# EAGLE board atmega32u4-board (EAGLE 6.4)
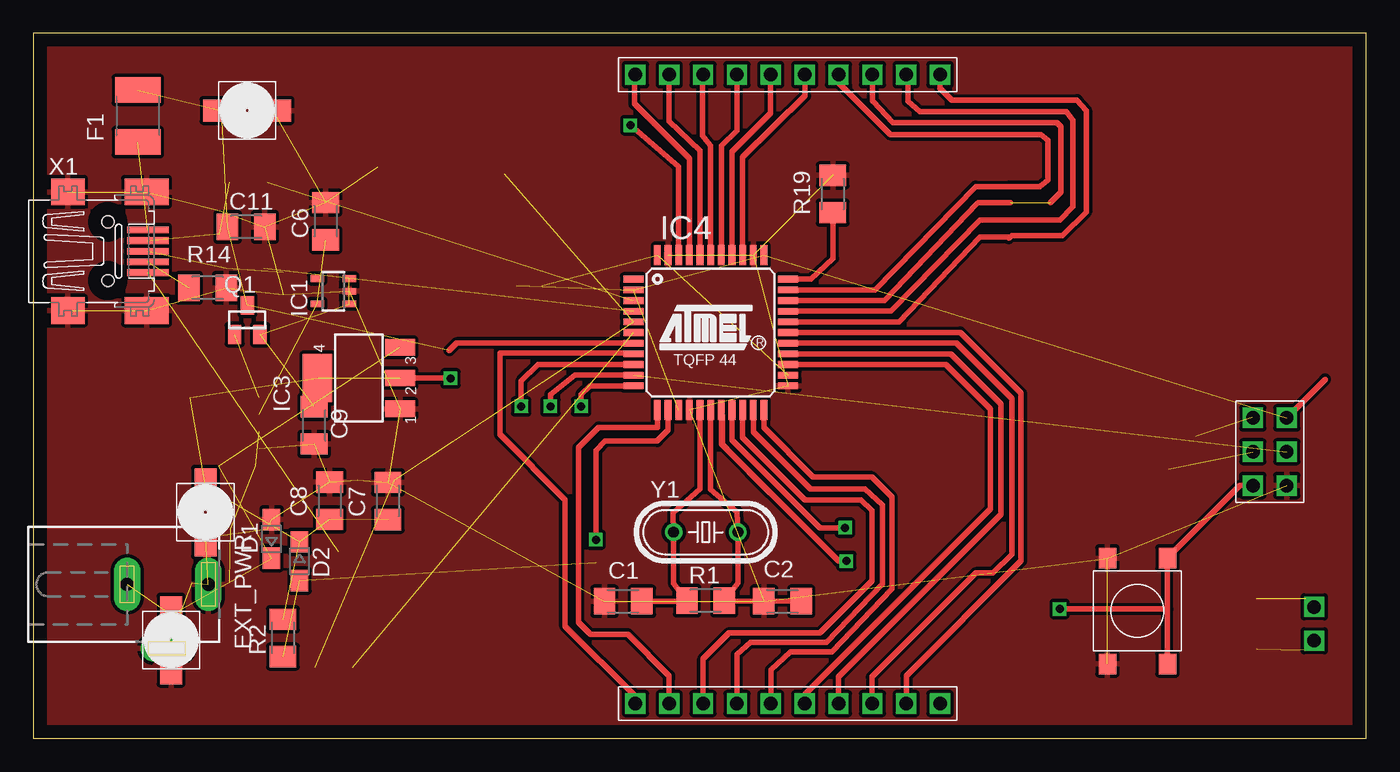
[diagram p0: board, top side]
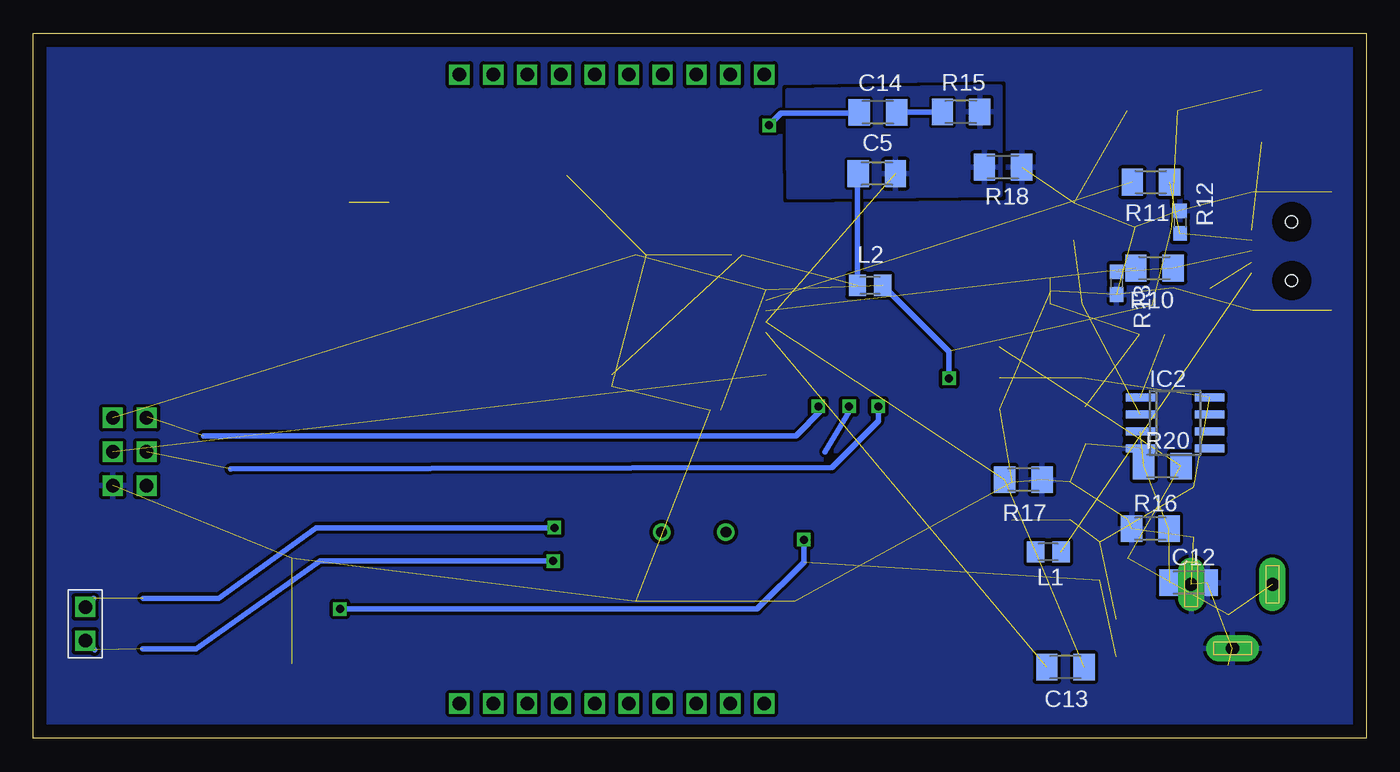
[diagram p1: board, bottom side, seen from below]

Size 100 x 52.9 mm. Coordinates in mm from the lower left corner, seen from the top.
Outline: 0,0 100,0 100,52.9 0,52.9 0,0
Copper layers (1*16): Top 0.035mm / dielectric 1.5mm / Bottom 0.035mm
Design rules "default": minimum track width 10mil, minimum drill 0.6mm, track to track 8mil, track to pad 8mil, pad to pad 8mil, via to via 8mil, smd to smd 8mil, copper to edge 40mil, drill to drill 8mil, minimum pad ring 10mil, minimum via ring 8mil, stop-mask expansion 4mil, vias tented up to drill 0mil, thermal gap 10mil

## Footprints (pad centres in the part's own frame; a part is rotated, then mirrored left to right if it is on the bottom)
SMD_1206_3216M = smd 1.6 x 2: 1 -1.4,0; 2 1.4,0
PANASONIC_SMD_CAP_B = smd 1.65 x 2.8: P$1 0,1.9; P$2 0,-1.9
SOD323 = smd 1.6 x 1.3: A 1.45,0; C -1.45,0
DCJ0202 = drill 1 pad 2 long: 1 0,3.1; 2 4.8,0; 3 0,-3
SMD_1812_4532M = smd 1.9 x 3.4: 1 -1.95,0; 2 1.95,0
HEADER_1_2 = drill 1.016 square: 1 -1.27,0; 2 1.27,0
HEADER_1_10 = drill 1.016 square: 1 -11.43,0; 2 -8.89,0; 3 -6.35,0; 4 -3.81,0; 5 -1.27,0; 6 1.27,0; 7 3.81,0; 8 6.35,0; 9 8.89,0; 10 11.43,0
SOT23-5 = smd 0.5 x 1: 1 -0.95,-1.2; 2 0,-1.2; 3 0.95,-1.2; 4 0.95,1.2; 5 -0.95,1.2
SO08 = smd 0.6 x 2.2: 1 -1.905,-2.6; 2 -0.635,-2.6; 3 0.635,-2.6; 4 1.905,-2.6; 5 1.905,2.6; 6 0.635,2.6; 7 -0.635,2.6; 8 -1.905,2.6
SOT223 = smd 1.219 x 2.235: 1 -2.311,-3.099; 2 0,-3.099; 3 2.311,-3.099 | smd 3.6 x 2.2: 4 0,3.099
TQFP44 = smd 1.5 x 0.5: 1 -5.8,4; 2 -5.8,3.2; 3 -5.8,2.4; 4 -5.8,1.6; 5 -5.8,0.8; 6 -5.8,0; 7 -5.8,-0.8; 8 -5.8,-1.6; 9 -5.8,-2.4; 10 -5.8,-3.2; 11 -5.8,-4; 23 5.8,-4; 24 5.8,-3.2; 25 5.8,-2.4; 26 5.8,-1.6; 27 5.8,-0.8; 28 5.8,0; 29 5.8,0.8; 30 5.8,1.6; 31 5.8,2.4; 32 5.8,3.2; 33 5.8,4 | smd 0.5 x 1.5: 12 -4,-5.8; 13 -3.2,-5.8; 14 -2.4,-5.8; 15 -1.6,-5.8; 16 -0.8,-5.8; 17 0,-5.8; 18 0.8,-5.8; 19 1.6,-5.8; 20 2.4,-5.8; 21 3.2,-5.8; 22 4,-5.8; 34 4,5.8; 35 3.2,5.8; 36 2.4,5.8; 37 1.6,5.8; 38 0.8,5.8; 39 0,5.8; 40 -0.8,5.8; 41 -1.6,5.8; 42 -2.4,5.8; 43 -3.2,5.8; 44 -4,5.8
HEADER_2_3 = drill 1.016 square: 1 -2.54,-1.27; 2 -2.54,1.27; 3 0,-1.27; 4 0,1.27; 5 2.54,-1.27; 6 2.54,1.27
SMD_0805_2012M = smd 1.3 x 1.6: 1 -0.95,0; 2 0.95,0
SUPER-SOT3 = smd 1 x 1.4: 1 -0.95,-1.1; 2 0.95,-1.1; 3 0,1.1
SMD_0603_1608M = smd 1.1 x 1: 1 -0.85,0; 2 0.85,0
OMRON_BS3_TAC_SWITCH = smd 1.55 x 1.3: P$1 3.975,-2.25; P$2 -3.97,-2.25; P$3 3.97,2.25; P$4 -3.97,2.25
32005-201 = smd 3.1 x 0.5: 1 3,1.6; 2 3,0.8; 3 3,0; 4 3,-0.8; 5 3,-1.6 | smd 2.5 x 2: M1 -3,-4.45; M2 -3,4.45 | smd 3.3 x 2: M3 2.9,4.45; M4 2.9,-4.45 | hole 0.9: 0,2.2; 0,-2.2
HC49/S = drill 0.813: 1 -2.413,0; 2 2.413,0

## Placement (x,y rotation side)
C1  22pF  [SMD_1206_3216M]  44.26,10.28 180 top
C2  22pF  [SMD_1206_3216M]  56.21,10.28 180 top
C3  10uF  [PANASONIC_SMD_CAP_B]  10.34,7.36 0 top
C4  10uF  [PANASONIC_SMD_CAP_B]  12.92,16.96 0 top
C5  1uF  [SMD_1206_3216M]  36.72,42.37 0 bottom
C6  1uF  [SMD_1206_3216M]  21.93,38.8 90 top
C7  0.1uF  [SMD_1206_3216M]  26.6,17.8 90 top
C8  0.1uF  [SMD_1206_3216M]  22.23,17.82 90 top
C9  1uF  [SMD_1206_3216M]  21.07,23.48 270 top
C10  10uF  [PANASONIC_SMD_CAP_B]  16.04,47.1 90 top
C11  0.1uF  [SMD_1206_3216M]  15.97,38.37 0 top
C12  0.1uF  [SMD_1206_3216M]  13.32,11.67 0 bottom
C13  1uF  [SMD_1206_3216M]  22.56,5.33 0 bottom
C14  0.1uF  [SMD_1206_3216M]  36.63,46.97 0 bottom
D1  [SOD323]  17.87,14.96 90 top
D2  [SOD323]  19.97,13.28 270 top
EXT_PWR  [DCJ0202]  10.03,11.55 270 top
F1  500mA  [SMD_1812_4532M]  7.84,46.69 90 top
HDR3  [HEADER_1_2]  96.1,8.58 90 bottom
HDR_LWR  [HEADER_1_10]  56.6,2.6 0 top
HDR_UPR  [HEADER_1_10]  56.6,49.8 0 top
IC1  [SOT23-5]  22.5,33.55 90 top
IC2  [SO08]  14.35,23.66 270 bottom
IC3  [SOT223]  24.42,27.03 90 top
IC4  [TQFP44]  50.82,30.45 0 top
ICSP  [HEADER_2_3]  92.77,21.5 270 top
L1  30Ω @ 100Mhz  [SMD_0805_2012M]  23.85,13.98 0 bottom
L2  30Ω @ 100Mhz  [SMD_0805_2012M]  37.22,33.98 0 bottom
Q1  [SUPER-SOT3]  16.06,31.4 0 top
R1  1MΩ  [SMD_1206_3216M]  50.44,10.32 0 top
R2  10kΩ  [SMD_1206_3216M]  18.73,7.52 90 top
R10  22Ω  [SMD_1206_3216M]  15.88,35.28 180 bottom
R11  22Ω  [SMD_1206_3216M]  16.14,41.73 180 bottom
R12  [SMD_0603_1608M]  13.97,38.73 270 bottom
R13  [SMD_0603_1608M]  18.73,34.15 90 bottom
R14  [SMD_1206_3216M]  13.08,33.8 0 top
R15  [SMD_1206_3216M]  30.4,47 0 bottom
R16  10kΩ  [SMD_1206_3216M]  16.19,15.72 0 bottom
R17  [SMD_1206_3216M]  25.72,19.4 0 bottom
R18  [SMD_1206_3216M]  27.24,42.85 0 bottom
R19  10kΩ  [SMD_1206_3216M]  59.98,40.84 90 top
R20  10kΩ  [SMD_1206_3216M]  15.29,20.42 0 bottom
SW2  [OMRON_BS3_TAC_SWITCH]  82.84,9.54 90 top
X1  [32005-201]  5.59,36.55 0 top
Y1  16Mhz  [HC49/S]  50.45,15.46 0 top

## Library data of the parts
C1-C14 D1 D2 F1 HDR3 HDR_LWR HDR_UPR IC1-IC4 ICSP L1 L2 Q1 R1 R2 R10-R20 SW2 Y1 = kris-verified
EXT_PWR = kris-verified; OC_FARNELL: unknown; OC_NEWARK: unknown
X1 = con-cypressindustries; OC_FARNELL: unknown; OC_NEWARK: unknown

## Nets
+3V3: C6.1 IC1.5 IC2.2
+5V: C4.P$1 C7.1 C8.1 D2.C IC2.8 IC3.2 IC3.4 IC4.2 IC4.14 IC4.34 ICSP.2 L2.2 R2.2
AGND: C5.2 C13.2 IC4.5 L1.1 R15.2 R17.1 R18.1
GND: C1.2 C2.2 C3.P$2 C4.P$2 C6.2 C7.2 C8.2 C9.2 C10.P$2 C11.2 C12.2 D1.A EXT_PWR.1 EXT_PWR.2 IC1.2 IC2.4 IC3.1 IC4.15 IC4.23 IC4.35 IC4.43 ICSP.6 R12.1 R13.1 R14.2 R16.1 R17.2 R18.2 R19.2 SW2.P$3 SW2.P$4 X1.M1 X1.M2 X1.M3 X1.M4
HDR_B0: HDR_LWR.1 IC4.8
HDR_B4: HDR_LWR.9 IC4.28
HDR_B5: HDR_UPR.10 IC4.29
HDR_B6: HDR_UPR.9 IC4.30
HDR_B7: HDR_LWR.2 IC4.12
HDR_C6: HDR_UPR.8 IC4.31
HDR_C7: HDR_UPR.7 IC4.32
HDR_D2: HDR_LWR.3 IC4.20
HDR_D3: HDR_LWR.4 IC4.21
HDR_D4: HDR_LWR.6 IC4.25
HDR_D5: HDR_LWR.5 IC4.22
HDR_D6: HDR_LWR.7 IC4.26
HDR_D7: HDR_LWR.8 IC4.27
HDR_E6: IC4.1
HDR_F0: HDR_UPR.1 IC4.41
HDR_F1: HDR_UPR.2 IC4.40
HDR_F4: HDR_UPR.3 IC4.39
HDR_F5: HDR_UPR.4 IC4.38
HDR_F6: HDR_UPR.5 IC4.37
HDR_F7: HDR_UPR.6 IC4.36
MISO: IC4.11 ICSP.1
MOSI: IC4.10 ICSP.4
N$1: C1.1 IC4.16 R1.1 Y1.1
N$3: IC4.33 R19.1
N$4: R10.1 R13.2 X1.3
N$5: C14.1 IC4.42
N$6: C5.1 IC4.24 IC4.44 L2.1
N$8: C9.1 IC1.1 IC1.3 Q1.2
N$14: C14.2 R15.1
N$22: R11.1 R12.2 X1.2
N$23: F1.1 X1.1
N$24: R14.1 X1.4
N$25: C12.1 IC2.3 R16.2 R20.1
N$26: IC2.1 Q1.1
N$34: HDR_LWR.10
Q1: C2.1 IC4.17 R1.2 Y1.2
RD+: IC4.4 R10.2
RD-: IC4.3 R11.2
RESET: D2.A IC4.13 ICSP.5 R2.1 SW2.P$1 SW2.P$2
SCK: IC4.9 ICSP.3
SCL: HDR3.1 IC4.18
SDA: HDR3.2 IC4.19
UCAP: C13.1 IC4.6
UGND: L1.2 X1.5
VIN: C3.P$1 D1.C EXT_PWR.3 IC3.3 R20.2
VUSB: C10.P$1 C11.1 F1.2 IC4.7 Q1.3

## Tracks (layer width: path | path; a pad name or v marks a point on that pad's centre or on a via)
+3V3  (2 unrouted)
+5V  (via drill 0.6)  (11 unrouted)
  Top 0.406: 54.8,36.27 IC4.34 | IC3.2 31.3,27.03 v31.3,27 | 96.92,26.92 ICSP.2
  Bottom 0.406: v31.3,27 31.3,29.01 L2.2
AGND  (4 unrouted)
  pour Bottom: 43.4,48.6 43.3,40.6 27.5,40.8 27.5,48.9
GND  (34 unrouted)
  pour Top (isolate 0.254): -0.3,41 -0.3,-0.6 100.4,-0.6 100.5,-0.5 100.3,53.3 0.7,53.3
  pour Bottom (isolate 0.254, rank 2): 0,53.5 100.5,53.5 100.4,40.3 100.4,-0.3 43.5,-0.3 41.9,-0.2 42,-0.5 29.6,-0.4 -0.3,-0.4 -0.3,40.8
HDR_B0
  Top 0.406: HDR_LWR.1 45.17,3.13 39.9,8.4 39.9,17.9 35,22.8 35,28.9 44.97,28.9 IC4.8
HDR_B4
  Top 0.406: IC4.28 69.55,30.45 74.1,25.9 74.1,13.3 65.5,4.7 HDR_LWR.9
HDR_B5
  Top 0.406: HDR_UPR.10 68.03,48.77 68.9,47.9 78.3,47.9 79,47.1 79,39.5 77.2,37.7 73.4,37.7 73.17,37.52 73.25,37.6 71,37.6 64.95,31.25 IC4.29
HDR_B6
  Top 0.406: IC4.30 64.35,32.05 71,38.9 77,38.9 78,39.9 78,46.4 77.5,47 66.5,47 65.6,47.8 65.6,49.69 HDR_UPR.9
HDR_B7
  Top 0.406: HDR_LWR.2 47.71,4.49 47.7,4.5 47.7,4.7 44.6,7.8 41.8,7.8 40.9,8.7 40.9,21.8 42.42,23.32 46.82,23.32 IC4.12
HDR_C6  (1 unrouted)
  Top 0.406: 76.3,40.2 77.1,41 77.1,45.9 76.8,46.2 64.5,46.2 63,47.8 62.95,47.85 HDR_UPR.8 | IC4.31 63.85,32.85 70.8,40.1 70.9,40.2 73.2,40.2 73.3,40.2
HDR_C7
  Top 0.406: IC4.32 63.15,33.65 70.7,41.4 73.2,41.4 73.23,41.4 75.5,41.4 76.1,41.9 76.1,44.9 75.6,45.3 64.3,45.3 60.41,49.19 HDR_UPR.7
HDR_D2
  Top 0.406: IC4.20 53.22,22.58 57.9,17.9 62.1,17.9 62.9,17.1 62.9,11.8 59,7.9 52.2,7.9 50.25,5.95 HDR_LWR.3
HDR_D3
  Top 0.406: IC4.21 54.02,22.98 58.3,18.7 62.4,18.7 63.7,17.5 63.7,11.6 59.5,7.2 53.8,7.2 52.79,6.29 HDR_LWR.4
HDR_D4
  Top 0.406: IC4.25 68.45,28.05 71.8,24.7 71.8,17.2 57.9,3.3 57.9,2.63 HDR_LWR.6
HDR_D5
  Top 0.406: HDR_LWR.5 55.33,5.13 56.8,6.5 59.9,6.5 64.4,11.2 64.4,18.1 62.9,19.6 58.5,19.6 54.8,23.3 54.8,24.63 IC4.22
HDR_D6
  Top 0.406: IC4.26 68.85,28.85 72.6,25.1 72.6,16.8 60.4,4.6 HDR_LWR.7
HDR_D7
  Top 0.406: IC4.27 69.25,29.65 73.4,25.5 73.4,13.8 72,12.4 70.7,12.4 62.9,4.6 62.9,2.65 HDR_LWR.8
HDR_F0
  Top 0.406: IC4.41 49.22,43.48 45.1,47.6 45.1,49.87 HDR_UPR.1
HDR_F1
  Top 0.406: IC4.40 50.02,44.08 47.7,46.3 HDR_UPR.2
HDR_F4
  Top 0.406: IC4.39 50.82,44.48 50.2,45.2 50.2,49.75 HDR_UPR.3
HDR_F5
  Top 0.406: IC4.38 51.62,44.48 52.8,45.6 HDR_UPR.4
HDR_F6
  Top 0.406: IC4.37 52.42,44.02 55.3,46.9 55.3,49.67 HDR_UPR.5
HDR_F7
  Top 0.406: IC4.36 53.22,43.62 57.9,48.2 57.9,49.77 HDR_UPR.6
MISO  (via drill 0.6)  (1 unrouted)
  Top 0.406: IC4.11 41.75,26.45 41.1,25.8 v41.1,24.9
  Bottom 0.406: v41.1,24.9 40.9,24.6 42.8,22.7 87.2,22.7 | 91.44,24.1 ICSP.1
MOSI  (via drill 0.6)  (1 unrouted)
  Top 0.406: IC4.10 40.65,27.25 38.8,25.8 v38.8,24.9
  Bottom 0.406: v38.8,24.9 38.8,24.5 40.6,21.5
N$1
  Top 0.406: 49.2,10.36 R1.1 | IC4.16 50.02,18.72 48,16.9 Y1.1 48.04,11.62 R1.1 | C1.1 48.78,10.28 R1.1
N$3
  Top 0.406: IC4.33 58.35,34.45 60,36 60,39.38 R19.1
N$4  (2 unrouted)
N$5  (via drill 0.6)
  Top 0.406: IC4.42 48.42,42.88 v44.8,46
  Bottom 0.406: v44.8,46 43.9,46.9 38.56,46.9 C14.1
N$6  (2 unrouted)
  Bottom 0.406: C5.1 38.17,42.32 L2.1
N$8  (3 unrouted)
N$14
  Bottom 0.406: C14.2 31.73,46.97 R15.1
N$17
  Top 0.406: 51.7,24.2 51.7,22.1 53.7,20 56.9,16.8
N$22  (2 unrouted)
N$23  (1 unrouted)
N$24  (1 unrouted)
N$25  (3 unrouted)
N$26  (1 unrouted)
Q1
  Top 0.406: IC4.17 50.82,18.68 52.8,17 Y1.2 52.86,11.64 R1.2 51.74,10.32 C2.1
RD+  (1 unrouted)
RD-  (1 unrouted)
RESET  (via drill 0.6)  (2 unrouted)
  Top 0.406: SW2.P$2 85.09,9.7 | 85.09,9.7 SW2.P$1 90.53,18.96 ICSP.5 | IC4.13 47.62,23.12 46.8,22.3 42.9,22.3 42.2,21.6 v42.2,14.9 | v77,9.7 85.09,9.7
  Bottom 0.406: v42.2,14.9 42.2,13.2 45.7,9.7 v77,9.7
SCK  (via drill 0.6)  (1 unrouted)
  Top 0.406: IC4.9 37.85,28.05 36.6,26.8 v36.6,24.9
  Bottom 0.406: v36.6,24.9 36.6,23.8 40.1,20.3 85.2,20.2
SCL  (via drill 0.6)  (1 unrouted)
  Top 0.406: IC4.18 51.62,22.08 60.4,13.3 v61,13.3
  Bottom 0.406: v61,13.3 78.5,13.3 87.8,6.7 91.81,6.7 | 95.41,6.62 HDR3.1
SDA  (via drill 0.6)  (1 unrouted)
  Top 0.406: IC4.19 52.42,22.38 59,15.8 v60.9,15.8
  Bottom 0.406: v60.9,15.8 78.8,15.8 86.1,10.5 91.76,10.5 | 95.47,10.48 HDR3.2
UCAP  (1 unrouted)
  Bottom 0.406: C13.1 23.96,5.06 23.9,5
UGND  (1 unrouted)
VIN  (4 unrouted)
VUSB  (4 unrouted)
  Top 0.406: IC4.7 31.75,29.65 31.2,29.1